# Allegro board backup.brd
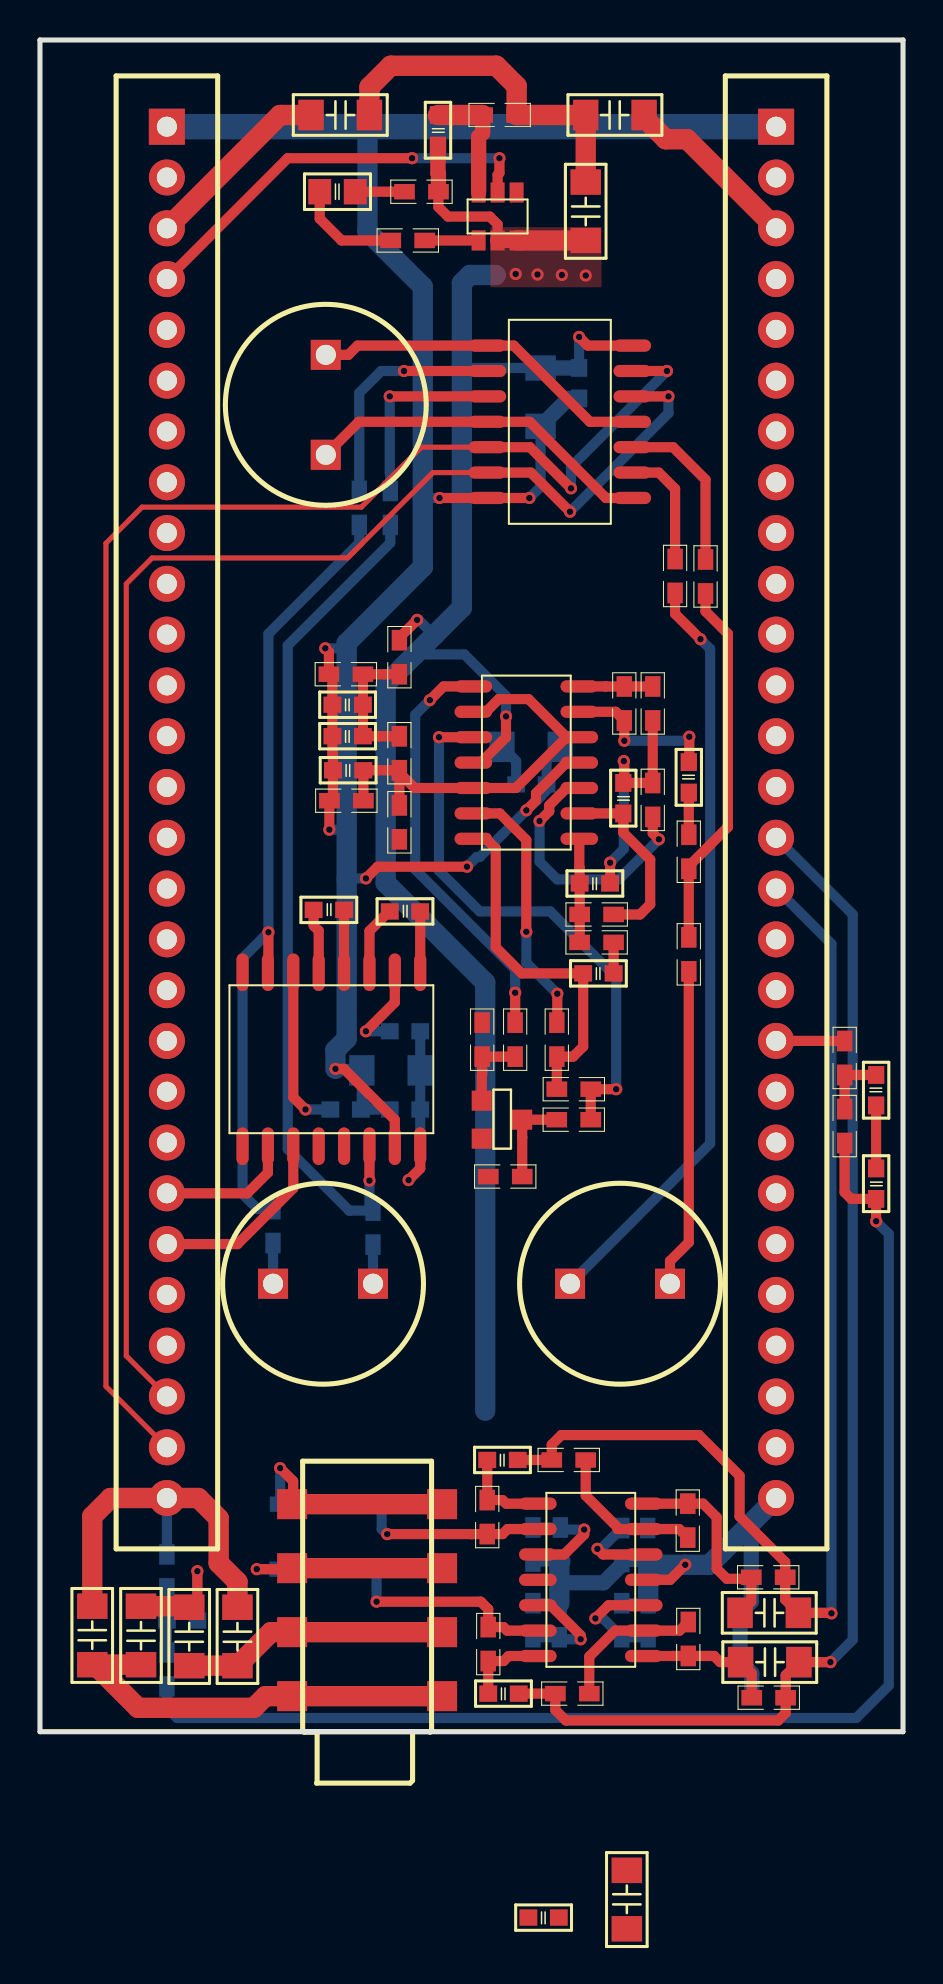
[diagram p0: board, top side]
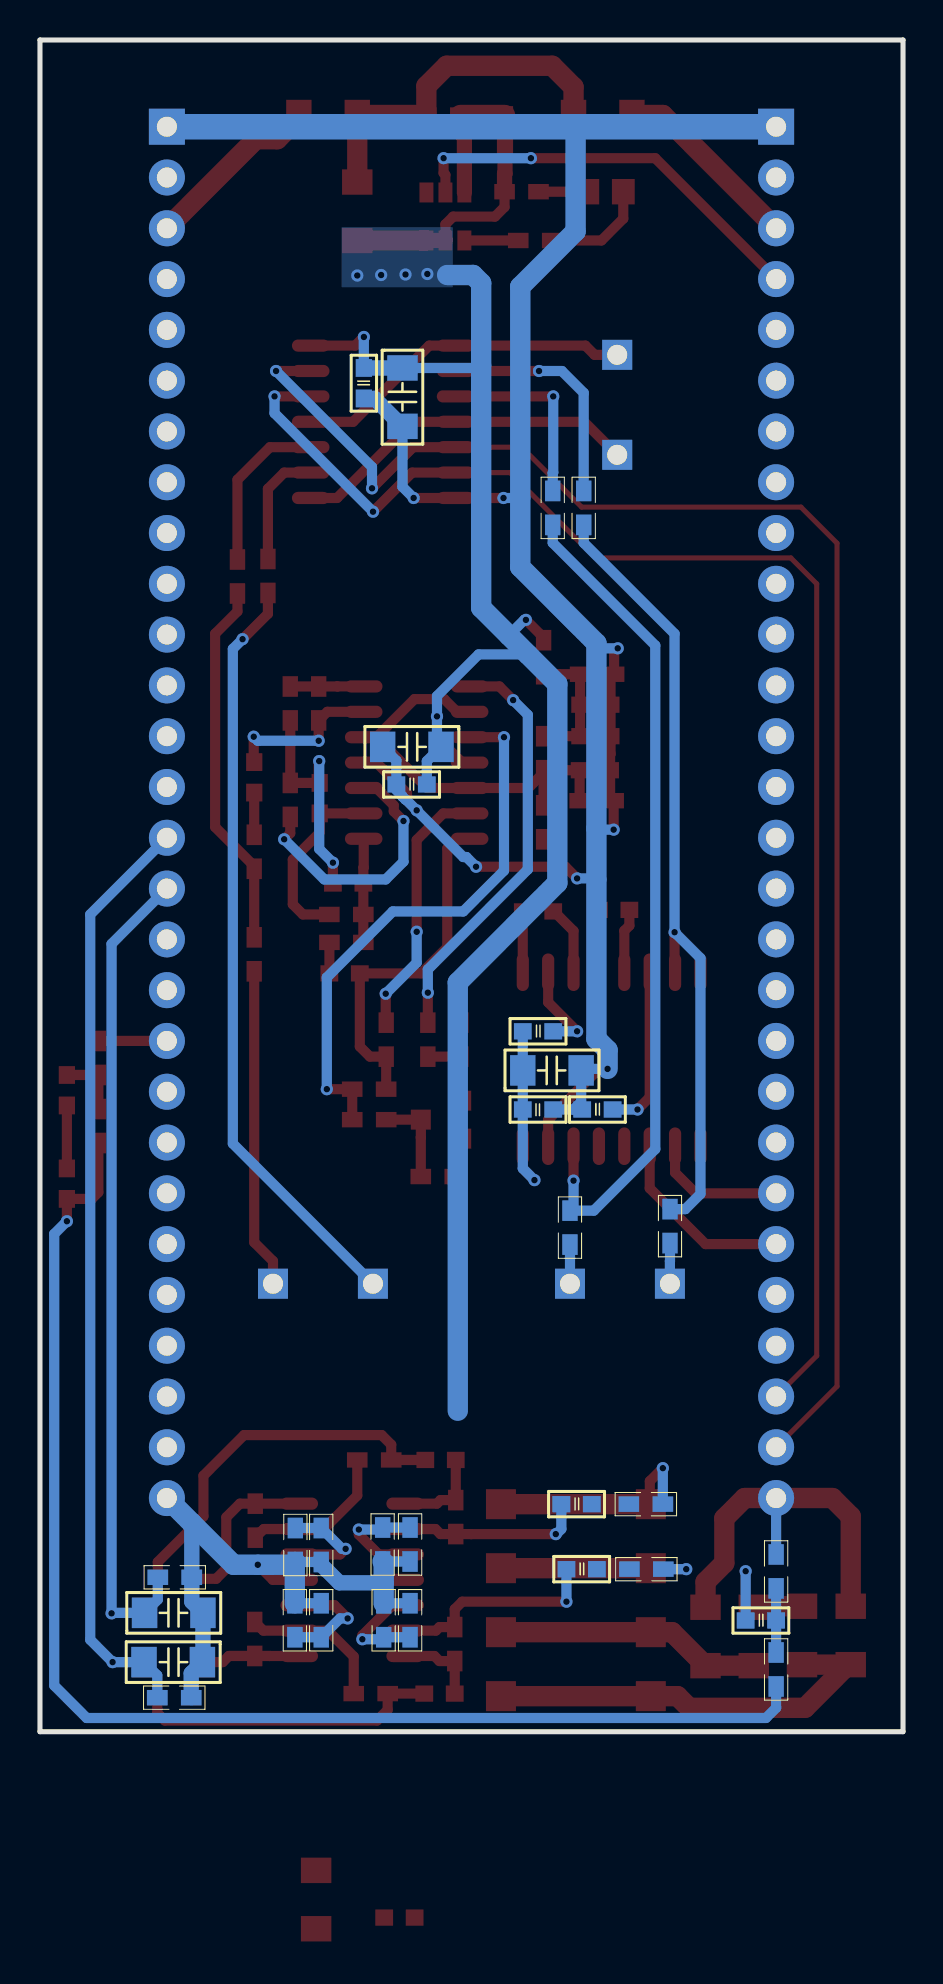
[diagram p1: board, bottom side, seen from below]

Outline 43.18 x 84.6 mm; copper layers: TOP, BOTTOM. Coordinates in mm from the lower left corner of the outline.
Outline path: 0,84.6 0,0 43.18,0 43.18,84.6 0,84.6

## Placement (name value [footprint] x y rotation side)
C1  0.1uF  [C0603]  19.91 80.09 90 top
C2  0.1uF  [C0603]  41.83 32.08 270 top
C3  0.1uF  [C0603]  41.83 27.41 90 top
C4  10uF  [C0603]  7.11 5.56 0 bottom
C5  0.1uF  [C0603]  18.26 41.02 180 top
C6  0.1uF  [C0603]  18.26 31.11 180 bottom
C7  10uF  [C1206]  19.28 33.07 180 bottom
C8  0.1uF  [C0603]  14.45 41.1 180 top
C9  0.1uF  [C0603]  18.26 35.03 0 bottom
C10  0.1uF  [C0603]  15.29 31.11 0 bottom
C11  10uF  [C0603]  23.14 13.59 0 top
C12  10uF  [C0603]  16.33 11.38 0 bottom
C13  47uF  [C1206]  38.2 5.94 180 bottom
C14  10uF  [C0603]  16.08 8.13 0 bottom
C15  47uF  [C1206]  34.8 3.48 0 bottom
C16  10uF  [C0603]  23.19 1.91 0 top
C17  10uF  [C0603]  32.46 47.73 270 top
C18  0.1uF  [C0603]  29.18 46.69 90 top
C19  10uF  [C0603]  27.94 37.92 0 top
C20  0.1uF  [C0603]  27.76 42.42 0 top
C21  0.1uF  [C0603]  26.97 67.44 270 bottom
C22  10uF  [C1206]  25.04 68.45 270 bottom
C23  0.1uF  [C0603]  25.2 -9.3 0 top
C24  10uF  [C1206]  29.36 -6.68 270 top
C25  10uF  [C0603]  15.39 51.36 0 top
C26  10uF  [C0603]  15.39 49.78 0 top
C27  10uF  [C0603]  15.42 48.08 0 top
C28  0.1uF  [C0603]  24.59 47.37 0 bottom
C29  10uF  [C1206]  22.86 49.25 0 bottom
D1  LED  [C0805]  14.88 77.01 180 top
D2  DIODE PIN  [C1206]  38.2 5.94 180 top
D3  DIODE PIN  [C1206]  38.23 3.48 180 top
J1  CONN FLEX 28  [PIN28]  36.83 80.26 180 top
J2  CONN FLEX 28  [PIN28]  6.35 80.26 180 top
MK1  T  [SPEAKER_10MM]  16.66 22.4 90 top
MK2  T  [SPEAKER_10MM]  31.52 22.4 90 top
MK3  T  [SPEAKER_10MM]  14.3 63.86 0 top
Q1  MMBT3904/SOT  [MMBT3904]  23.11 30.61 180 top
R1  0  [C1206]  5.05 3.1 90 top
R2  0  [C1206]  7.47 3.05 90 top
R3  0  [C1206]  2.62 6.53 270 top
R4  0  [C1206]  27.05 80.85 0 top
R5  0  [C1206]  16.74 80.85 180 top
R6  10K  [R0603]  17.55 74.57 0 top
R7  0  [C1206]  9.88 3.05 90 top
R8  10K  [R0603]  18.24 77.01 0 top
R9  10K  [R0603]  40.26 32.84 90 top
R10  10K  [R0603]  40.26 29.44 90 top
R11  10K  [R0603]  22.15 80.85 0 top
R12  10K  [R0603]  6.35 3.96 270 bottom
R13  0  [C1206]  27.3 74.32 90 top
R14  10K  [R0603]  6.35 8.86 270 bottom
R15  0  [R0603]  35.59 7.72 0 top
R16  10K  [R0603]  22.38 11.58 270 top
R17  10K  [R0603]  32.41 11.4 270 top
R18  10K  [R0603]  35.59 7.72 0 bottom
R19  1K  [R0603]  13.72 11.38 180 bottom
R20  10K  [R0603]  27.3 13.59 180 top
R21  10K  [R0603]  22.43 27.76 0 top
R22  1K  [R0603]  13.69 8.13 180 bottom
R23  10K  [R0603]  27.48 1.91 180 top
R24  3.9K  [R0603]  22.12 35.46 270 top
R25  10K  [R0603]  32.44 5.49 270 top
R26  10K  [R0603]  37.31 1.7 180 bottom
R27  10K  [R0603]  22.43 5.23 270 top
R28  10K  [R0603]  23.77 35.46 270 top
R29  6.8K  [R0603]  30.66 50.57 90 top
R30  0  [R0603]  35.61 1.7 0 top
R31  1K  [R0603]  25.86 30.61 0 top
R32  47K  [R0603]  29.24 50.57 90 top
R33  10K  [R0603]  32.46 43.15 90 top
R34  160  [R0603]  30.66 47.45 270 top
R35  2K  [R0603]  27.56 32.13 180 top
R36  75K  [R0603]  25.86 35.46 270 top
R37  1K  [R0603]  24.66 10.21 270 bottom
R38  10K  [R0603]  26.04 10.21 270 bottom
R39  1K  [R0603]  24.66 4.72 90 bottom
R40  10K  [R0603]  25.98 4.72 90 bottom
R41  1K  [R0603]  30.4 10.19 270 bottom
R42  10K  [R0603]  29.11 10.19 270 bottom
R43  1K  [R0603]  30.43 4.72 90 bottom
R44  10K  [R0603]  29.11 4.72 90 bottom
R45  75K  [R0603]  28.7 40.87 180 top
R46  0  [R0603]  17.53 60.35 90 bottom
R47  10K  [R0603]  27 39.47 0 top
R48  0  [R0603]  15.98 60.35 90 bottom
R49  1K  [R0603]  17.98 54.58 270 top
R50  1K  [R0603]  16.15 52.88 180 top
R51  120K  [R0603]  17.98 48.08 90 top
R52  0  [R0603]  17.98 44.63 90 top
R53  0  [R0603]  33.3 56.92 90 top
R54  0  [R0603]  31.78 56.95 90 top
R55  120K  [R0603]  14.48 46.56 0 top
R56  0  [R0603]  16.66 24.36 90 bottom
R57  0  [R0603]  11.66 24.43 90 bottom
R58  0  [R0603]  32.46 39.73 270 top
U1  MIC  [MIC_3-5MM_4PIN]  20.12 1.78 90 top
U2  -  [FDG6342L]  21.95 74.57 90 top
U3  -  [MAX202E]  14.58 33.63 270 top
U4  -  [SGM324YS14]  27.56 7.59 0 top
U5  -  [SGM324YS14]  24.33 48.46 0 top
U6  -  [CD4066]  26.01 65.51 0 top

## Library data of the parts
C1-C29 = CAP NP
D1 = LED
D2 D3 = DIODE PIN
J1 J2 = CONN FLEX 28
MK1-MK3 = MICROPHONE
Q1 = MMBT3904/SOT_1
R1-R58 = R
U1 = MIC
U2 = FDG6342L
U3 = MAX3232EUE
U4 U5 = SGM324YS14
U6 = CD4066

## Footprints (pads in the part's own frame, mm; a bottom-side part is the same pattern mirrored in y, then rotated)
C0603
  rect 0.889x0.813 smd: 1(-0.762,0) 2(0.762,0)
C0805
  rect 1.143x1.27 smd: 1(-0.889,0) 2(0.889,0)
C1206
  rect 1.27x1.524 smd: 1(0.254,0) 2(3.175,0)
CD4066
  oval 1.88x0.61 smd: 1(-3.625,3.81) 2(-3.625,2.54) 3(-3.625,1.27) 4(-3.625,0) 5(-3.625,-1.27) 6(-3.625,-2.54) 7(-3.625,-3.81) 8(3.625,-3.81) 9(3.625,-2.54) 10(3.625,-1.27) 11(3.625,0) 12(3.625,1.27) 13(3.625,2.54) 14(3.625,3.81)
FDG6342L
  rect 1x0.7 smd: 1(0,0) 2(0,-0.95) 3(0,-1.9) 4(2.4,-1.9) 5(2.4,-0.95) 6(2.4,0)
MAX202E
  oval 1.88x0.61 smd: 1(-4.35,4.445) 2(-4.35,3.175) 3(-4.35,1.905) 4(-4.35,0.635) 5(-4.35,-0.635) 6(-4.35,-1.905) 7(-4.35,-3.175) 8(-4.35,-4.445) 9(4.35,-4.445) 10(4.35,-3.175) 11(4.35,-1.905) 12(4.35,-0.635) 13(4.35,0.635) 14(4.35,1.905) 15(4.35,3.175) 16(4.35,4.445)
MIC_3-5MM_4PIN
  rect 1.5x1.5 smd: 1(0,0) 2(3.2,0) 3(6.4,0) 4(9.6,0) 5(9.6,7.5) 6(6.4,7.5) 7(3.2,7.5) 8(0,7.5)
MMBT3904
  rect 1x1 smd: 1(1.01,-0.95) 2(1.01,0.95) 3(-1.01,0)
PIN28
  rect 1.801x1.801 hole 1.001: 1(0,0)
  round 1.801 hole 1.001: 2(0,2.54) 3(0,5.08) 4(0,7.62) 5(0,10.16) 6(0,12.7) 7(0,15.24) 8(0,17.78) 9(0,20.32) 10(0,22.86) 11(0,25.4) 12(0,27.94) 13(0,30.48) 14(0,33.02) 15(0,35.56) 16(0,38.1) 17(0,40.64) 18(0,43.18) 19(0,45.72) 20(0,48.26) 21(0,50.8) 22(0,53.34) 23(0,55.88) 24(0,58.42) 25(0,60.96) 26(0,63.5) 27(0,66.04) 28(0,68.58)
R0603
  rect 1.031x0.77 smd: 1(0,0) 2(1.699,0)
SGM324YS14
  oval 1.88x0.61 smd: 1(-2.65,3.81) 2(-2.65,2.54) 3(-2.65,1.27) 4(-2.65,0) 5(-2.65,-1.27) 6(-2.65,-2.54) 7(-2.65,-3.81) 8(2.65,-3.81) 9(2.65,-2.54) 10(2.65,-1.27) 11(2.65,0) 12(2.65,1.27) 13(2.65,2.54) 14(2.65,3.81)
SPEAKER_10MM
  rect 1.5x1.5 hole 1: 1(0,0) 2(0,5)

## Nets
1/2VCC: C27.2 R51.1 R52.2 R55.2 U5.2(-IN A) U5.5(+IN B) U5.12(+IN D)
DGND: C2.2 C3.2 C6.2 C7.2 C10.2 C13.2 C15.1 C21.2 C22.2 C23.2 C24.2 C25.1 C26.1 C27.1 C28.2 C29.2 D1.2(CATHODE) J1.1 J1.28 J2.1 J2.28 MK2.2 Q1.2(E) R3.1 R6.1 R7.2 R14.1 R18.1 R24.1 R26.2 R37.2 R38.2 R39.2 R40.2 R41.2 R42.2 R43.2 R44.2 R50.2 R54.1 R55.1 U3.15(GND) U4.11(GND) U5.11(GND) U6.7(VSS)
GND1: R37.1 R38.1 U4.3(+IN A)
GND2: R39.1 R40.1 U4.5(+IN B)
GND3: R41.1 R42.1 U4.12(+IN D)
GND4: R43.1 R44.1 U4.10(+IN C)
VBAT: J1.4
VCC: C1.1 C6.1 C7.1 C9.2 C21.1 C22.1 C23.1 C24.1 C28.1 C29.1 R8.2 R13.1 R21.1 R49.1 U2.2(VOUT1) U2.3(VOUT2) U3.16(VCC) U4.4(VCC) U5.4(VCC) U6.14(VDD)
VDD3V3: J1.3 R4.2
VDD5V: J2.3 R5.2
BOOT0: J2.6
MIC_GND: R2.1 R7.1 U1.2 U1.7
MIC_IN: C4.2 R1.2 R2.2
MIC_LEFT: R19.2 U1.4 U1.5
MIC_RIGHT: R22.2 U1.3 U1.6
NRST: J1.10
PA0: C15.2 C16.2 D3.1(K) J1.15 R23.2 R26.1 R30.2
PA1: C11.2 C13.1 D2.1(K) J1.16 R15.2 R18.2 R20.2
PA2: J1.17
PA3: J1.18
PA4: J1.19 R9.2
PA5: J1.20
PA6: J1.21
PA7: J1.22
PA8: J2.23 U3.11(T1IN)
PA9: J2.22 U3.10(T2IN)
PA10: J2.21
PA11: J2.20
PA12: J2.19
PA13: J2.18
PA14: J2.17
PA15: J2.16
PB0: J1.25 R52.1
PB1: J1.26 Q1.3(C) R21.2 R31.1
PB2: J1.27
PB3: J2.11
PB4: J2.10
PB5: J2.9
PB6: J2.8
PB7: J2.7
PB8: J2.5
PB9: J2.4 U2.5(ON/OFF)
PC0: J1.11
PC1: J1.12
PC2: J1.13
PC3: J1.14
PC4: J1.23
PC5: J1.24
PC6: J2.27 U6.5(CON_B) U6.13(CON_A)
PC7: J2.26 U6.6(CON_C) U6.12(CON_D)
PC8: J2.25
PC9: J2.24
PC10: J2.15
PC11: J2.14
PC12: J2.13
PC13: J1.5
PC14: J1.6
PC15: J1.7
PD0: J1.8
PD1: J1.9
PD2: J2.12
RIN1: R33.1 R53.1 R58.1
TOUT1: R46.1 R56.2 U3.14(T1OUT)
TOUT2: R48.1 R57.2 U3.7(T2OUT)
N16399285: C17.2 R33.2
N16402037: C17.1 R32.1 U5.13(-IN D)
N16402041: R29.2 R32.2 U5.14(OUT D)
N16402104: C18.2 C20.2 R29.1 R34.1
N16402149: R34.2 U5.10(+IN C)
N16402349: C18.1 R45.1 U5.9(-IN C)
N16402353: C20.1 R45.2 R47.1 U5.8(OUT C)
N16402571: C19.2 R47.2
N16402585: C19.1 R35.2 R36.2 U5.7(OUT B)
N16402610: R36.1 U5.6(-IN B)
N16402861: R31.2 R35.1 U5.3(+IN A)
N16403394: C25.2 C26.2 R49.2 R50.1 R51.2
N16489611: R28.1 U5.1(OUT A)
N16489615: Q1.1(B) R24.2 R28.2
N16496366: R1.1 R3.2 U1.1 U1.8
N16496686: C2.1 R9.1 R10.2
N16496722: C3.1 R10.1 R12.2
N16497141: C4.1 R12.1 R14.2
N16497486: C12.2 R16.2 U4.2(-IN A)
N16497494: C12.1 R19.1
N16497624: C11.1 R16.1 U4.1(OUT A)
N16497986: C14.1 R22.1
N16497996: C14.2 R27.1 U4.6(-IN B)
N16498091: C16.1 R27.2 U4.7(OUT B)
N16498977: R17.2 R20.1 U4.13(-IN D)
N16498986: D2.2(A) R15.1 R17.1 U4.14(OUT D)
N16499222: R23.1 R25.1 U4.9(-IN C)
N16499259: D3.2(A) R25.2 R30.1 U4.8(OUT C)
N16503662: MK3.2 U6.1(A) U6.11(D0)
N16503677: MK3.1 U6.4(B0) U6.8(C)
N16503744: R48.2 U6.2(A0)
N16503759: R46.2 U6.3(B)
N16503929: R53.2 U6.10(D)
N16503933: R54.2 U6.9(C0)
N16508094: C5.1 U3.1(C1+)
N16508118: C5.2 U3.3(C1-)
N16508122: C8.1 U3.4(C2+)
N16508134: C8.2 U3.5(C2-)
N16508194: C9.1 U3.2(V+)
N16508198: C10.1 U3.6(V-)
N16508477: R4.1 R5.1 R11.2 R13.2 U2.4(VIN)
N16508598: C1.2 R11.1 U2.6(R1)
N16509172: R6.2 U2.1(R2)
N16519451: MK1.1 R56.1
N16519490: MK1.2 R57.1
N16520069: MK2.1 R58.2
N165143311: D1.1(ANODE) R8.1

Pads without a net: J1 2; J2 2; U3 8 9 12 13

## Via types
v1: diameter 0.61, hole 0.33, TOP to BOTTOM, 54 vias

## Routing (per net, layer and track width the routed paths; a pad name or vN(x,y) marks a point on that pad's centre or on a via; arc(x,y) is an arc through that point)
1/2VCC: length 21.2
  TOP w0.508: 26.35,49.73 24.44,51.64 22.95,51.64 22.32,51 U5.2 ; 26.35,49.73 U5.12 ; 26.35,49.73 23.81,47.19 U5.5 18.74,47.19 17.98,47.95 ; 17.98,47.95 R52.2 ; 17.98,47.95 R51.1 C27.2 16.18,46.56 R55.2
DGND: length 230.5
  TOP w0.508: v1(21.36,43.26) 16.89,43.26 v1(16.31,42.67) ; v1(24.33,46.08) 24.82,46.56 24.82,46.93 26.35,48.46 U5.11 ; v1(32.28,8.35) 31.53,7.59 U4.11 ; U3.15 17.75,30.6 15.21,33.15 v1(14.78,33.15) ; R6.1 15.09,74.57 14,75.67 D1.2 ; C2.2 C3.2 ; v1(19.99,61.7) U6.7 v1(24.49,61.7) ; v1(14.27,54.18) 14.46,54 R50.2 14.63,52.71 C25.1 C26.1 14.63,48.9 14.66,48.87 C27.1 14.66,46.74 R55.1 v1(14.48,45.11) ; R54.1 31.78,55.91 v1(33.05,54.64)
  TOP w1.016: R3.1 2.62,10.77 3.53,11.68 J2.28 7.92,11.68 8.94,10.67 8.94,8.43 9.88,7.49 R7.2
  BOTTOM w0.508: 15.34,45.16 15.29,45.11 v1(14.48,45.11) ; v1(14.27,54.18) 15.09,54.18 15.34,54.43 ; v1(24.49,61.7) 25.04,62.26 C22.2 ; v1(16.31,42.67) 15.39,42.67 15.34,42.62 ; 16.48,31.11 C6.2 ; 16.48,31.11 16.1,31.5 C7.2 16.03,33.15 v1(14.78,33.15) ; 16.48,31.11 C10.2 ; J2.28 R14.1 ; C29.2 25.35,48.56 C28.2 25.35,47.09 25.04,46.79 25.04,46.76 24.9,46.61 24.87,46.61 v1(24.33,46.08) 22,43.74 21.85,43.74 v1(21.36,43.26) ; R41.2 R42.2 ; R37.2 R38.2 ; v1(33.05,54.64) 33.53,54.15 33.53,29.41 MK2.2 ; v1(19.99,61.7) 19.15,61.7 ; R39.2 R40.2 ; R44.2 R43.2
  BOTTOM w0.762: C21.2 26.44,66.67 C22.2 ; R26.2 35.61,2.92 C15.1 35.03,3.51 C13.2 35.59,6.5 R18.1 35.59,10.44 ; R42.2 29.11,8.36 28.2,7.45 25.98,7.45
  BOTTOM w1.016: R40.2 25.98,8.46 R38.2 ; 30.43,8.46 30.54,8.35 v1(32.28,8.35) 33.49,8.35 J1.28 ; 30.43,8.46 R43.2 ; 30.43,8.46 R41.2 ; 16.38,80.26 16.38,75.03 19.15,72.26 19.15,58.24 15.34,54.43 15.34,34.65 14.78,34.09 v1(14.78,33.15)
  BOTTOM w1.27: J2.1 J1.1
GND1: length 5.6
  TOP w0.508: U4.3 26.23,8.86 27.23,9.86 v1(27.23,10.11)
  BOTTOM w0.508: v1(27.23,10.11) 26.14,10.11 R38.1 R37.1
GND2: length 5.4
  TOP w0.508: U4.5 25.54,6.32 27.05,4.82 v1(27.05,4.62)
  BOTTOM w0.508: v1(27.05,4.62) 26.09,4.62 R40.1 R39.1
GND3: length 5.4
  TOP w0.508: U4.12 28.17,8.86 v1(27.89,9.14)
  BOTTOM w0.508: v1(27.89,9.14) 28.07,9.14 R42.1 R41.1
GND4: length 5.7
  TOP w0.508: v1(27.79,5.66) 28.45,6.32 U4.10
  BOTTOM w0.508: v1(27.79,5.66) 28.17,5.66 R44.1 R43.1
VCC: length 109.4
  TOP w0.508: U6.14 27.41,69.32 v1(26.97,69.75) ; U3.16 19.02,28.17 v1(18.44,27.58) ; v1(23.32,50.77) 23.32,49.73 22.06,48.46 U5.4 ; R49.1 17.98,54.72 v1(18.87,55.6) ; U2.2 22.9,75.38 22.51,75.77 20.42,75.77 19.94,76.25 R8.2
  TOP w0.762: R8.2 19.94,77.91 19.91,77.93 C1.1 ; U2.2 U2.3
  TOP w1.016: U2.3 R13.1
  BOTTOM w0.508: C9.2 C7.1 C6.1 19.02,28.17 v1(18.44,27.58) ; 21.11,68.33 21.23,68.2 C22.1 ; 19.72,54.83 18.95,55.6 v1(18.87,55.6) ; v1(26.97,69.75) C21.1 ; 18.77,53.87 21.23,53.87 23.32,51.79 v1(23.32,50.77) 23.32,49.45 C29.1 23.83,48.54 C28.1
  BOTTOM w0.762: C21.1 C22.1
  BOTTOM w1.016: 22.81,72.85 21.51,72.85 21.11,72.44 21.11,56.21 17.3,52.4 17.3,42.44 22.28,37.47 22.28,16.05
  vias: v1(23.8,72.9) v1(24.89,72.87) v1(26.11,72.85) v1(27.3,72.82)
VDD3V3: length 9
  TOP w1.016: J1.3 32.38,79.64 31.31,79.64 30.23,80.72 R4.2
VDD5V: length 9.6
  TOP w1.016: R5.2 12.01,80.85 J2.3
MIC_GND: length 13.5
  TOP w1.016: R7.1 11.56,4.98 U1.7 U1.2 20.17,4.98 ; R7.1 10.01,3.3 ; R7.1 R2.1
MIC_IN: length 6.9
  TOP w0.508: R2.2 7.87,6.63 v1(7.87,8.03)
  TOP w1.016: R1.2 7.42,6.27 R2.2
  BOTTOM w0.508: C4.2 v1(7.87,8.03)
MIC_LEFT: length 11.4
  TOP w0.508: 12.67,11.38 12.67,12.53 v1(12.02,13.18)
  TOP w1.016: 20.17,11.38 U1.4 12.67,11.38
  BOTTOM w0.508: R19.2 v1(12.02,13.18)
MIC_RIGHT: length 10.5
  TOP w0.508: v1(10.85,8.13) 12.62,8.13 12.67,8.18
  TOP w1.016: 20.17,8.18 U1.3 12.67,8.18
  BOTTOM w0.508: R22.2 v1(10.85,8.13)
PA0: length 65.8
  TOP w0.508: C16.2 25.78,1.91 25.78,1.09 26.31,0.56 36.93,0.56 37.31,0.94 R30.2 37.31,2.82 D3.1 v1(39.55,3.48)
  BOTTOM w0.508: J1.15 40.67,40.87 40.67,4.6 v1(39.55,3.48) D3.1 37.31,2.82 R26.1
PA1: length 63.8
  TOP w0.508: C11.2 R20.2 25.61,14.35 26.08,14.83 32.97,14.83 35,12.8 35,10.77 37.28,8.49 R15.2 37.28,6.61 D2.1 39.57,5.94 v1(39.6,5.92)
  BOTTOM w0.508: J1.16 39.6,39.4 v1(39.6,5.92) 39.57,5.94 D2.1 37.28,6.61 R15.2
PA4: length 3.4
  TOP w0.508: J1.19 39.49,34.54 39.49,34.54 R9.2
PA8: length 9.6
  TOP w0.508: U3.11 12.67,27.18 9.88,24.38 J2.23
PA9: length 6.8
  TOP w0.508: J2.22 10.37,26.92 11.4,27.96 U3.10
PB1: length 4.6
  TOP w0.508: R21.2 24.13,29.72 24.12,29.73 Q1.3 R31.1
PB9: length 20.9
  TOP w0.508: U2.5 22.9,77.86 22.99,77.95 v1(22.99,78.69) ; J2.4 12.4,78.69 v1(18.62,78.69)
  BOTTOM w0.508: v1(18.62,78.69) v1(22.99,78.69)
PC6: length 82.2
  TOP w0.254: J2.27 3.3,17.27 3.3,59.44 5.11,61.24 16.08,61.24 19.08,64.24 U6.5
  TOP w0.508: v1(31.37,68.05) U6.13 ; U6.5 24.51,64.24 v1(26.57,62.18)
  BOTTOM w0.508: v1(31.37,68.05) 26.57,63.25 v1(26.57,62.18)
PC7: length 76.4
  TOP w0.254: U6.6 19.66,62.97 15.39,58.7 5.61,58.7 4.32,57.4 4.32,18.8 J2.26
  TOP w0.508: v1(26.52,61.01) 24.56,62.97 U6.6 ; v1(31.45,66.78) U6.12
  BOTTOM w0.508: v1(26.52,61.01) 31.45,65.94 v1(31.45,66.78)
RIN1: length 18.5
  TOP w0.508: R58.1 R33.1 32.46,43.29 34.42,45.24 34.42,54.91 33.3,56.02 R53.1
TOUT1: length 42.2
  TOP w0.508: U3.14 v1(16.48,27.56)
  BOTTOM w0.508: v1(16.48,27.56) 16.48,26.24 R56.2 15.47,26.06 12.4,29.13 12.4,54.32 17.53,59.45 R46.1
TOUT2: length 39.7
  TOP w0.508: U3.7 11.43,38.01 v1(11.43,39.98)
  BOTTOM w0.508: R48.1 15.98,59.45 11.43,54.91 v1(11.43,39.98) 10.13,38.68 10.13,26.89 10.89,26.13 R57.2
N16399285: length 2.1
  TOP w0.508: C17.2 R33.2
N16402037: length 8.1
  TOP w0.508: v1(32.49,49.76) 32.49,48.51 C17.1 ; U5.13 28.8,51 R32.1 v1(29.24,49.56)
  BOTTOM w0.508: v1(29.24,49.56) 32.28,49.56 v1(32.49,49.76)
N16402041: length 3.7
  TOP w0.508: U5.14 28.3,52.27 28.31,52.27 R32.2 R29.2
N16402104: length 12.1
  TOP w0.508: R29.1 R34.1 C18.2 29.24,47.5 29.24,48.51 v1(29.21,48.54) ; C20.2 v1(28.52,43.46)
  BOTTOM w0.508: v1(28.52,43.46) 29.21,44.15 v1(29.21,48.54)
N16402149: length 13.3
  TOP w0.508: v1(24.99,45.54) 25.48,46.03 25.48,46.32 26.35,47.19 U5.10 ; R34.2 30.66,44.93 v1(30.96,44.63)
  BOTTOM w0.508: v1(30.96,44.63) 28.96,42.62 25.88,42.62 24.99,43.51 v1(24.99,45.54)
N16402349: length 9.3
  TOP w0.508: R45.1 30.02,40.87 30.53,41.38 30.53,43.61 29.18,44.96 C18.1 U5.9
N16402353: length 5.2
  TOP w0.508: U5.8 26.98,43.22 27,43.21 C20.1 27,42.42 R45.2 27,39.47 R47.1
N16402571: length 1.6
  TOP w0.508: R47.2 28.7,37.92 C19.2
N16402585: length 18
  TOP w0.508: R35.2 25.86,33.76 R36.2 26.67,33.76 27.18,34.26 C19.1 24.1,37.92 22.8,39.22 22.8,44.17 22.32,44.65 U5.7
N16402610: length 13
  TOP w0.508: v1(25.88,36.91) 25.88,35.48 R36.1 ; U5.6 23,45.92 24.33,44.59 v1(24.33,40.01)
  BOTTOM w0.508: v1(25.88,36.91) 24.33,38.46 v1(24.33,40.01)
N16402861: length 27.9
  TOP w0.508: U5.3 v1(19.96,49.73) ; v1(28.83,32.13) R35.1 27.56,32.13 R31.2
  BOTTOM w0.508: v1(28.83,32.13) 28.83,37.72 25.53,41.02 22,41.02 19.96,43.06 v1(19.96,49.73)
N16403394: length 6.8
  TOP w0.508: R51.2 16.98,49.78 16.98,49.78 C26.2 C25.2 R50.1 17.21,52.88 17.22,52.89 R49.2
N16489611: length 21
  TOP w0.508: v1(23.77,36.96) R28.1 ; U5.1 20.19,52.27 v1(19.51,51.59)
  BOTTOM w0.508: v1(23.77,36.96) 23.77,38.12 18.77,43.12 18.77,50.85 v1(19.51,51.59)
N16489615: length 3.9
  TOP w0.508: Q1.1 22.1,32.84 22.12,32.86 R24.2 R28.2
N16496366: length 21
  TOP w1.016: R3.2 2.74,3.35 ; 2.74,3.35 4.9,1.19 10.7,1.19 11.28,1.78 U1.8 U1.1 20.17,1.78 ; 2.74,3.35 R1.1
N16496686: length 3.3
  TOP w0.508: R10.2 R9.1 C2.1
N16496722: length 66.8
  TOP w0.508: R10.1 40.26,26.97 40.59,26.64 C3.1 v1(41.83,25.53)
  BOTTOM w0.508: v1(41.83,25.53) 42.47,24.89 42.47,2.31 40.84,0.69 6.86,0.69 6.35,1.19 R12.2
N16497141: length 3.2
  BOTTOM w0.508: R12.1 C4.1 R14.2
N16497486: length 9.3
  TOP w0.508: U4.2 23.39,10.13 23.14,9.88 R16.2 21.61,9.88 21.61,9.88 v1(17.37,9.88)
  BOTTOM w0.508: C12.2 17.09,10.13 17.35,9.88 v1(17.37,9.88)
N16497624: length 4.6
  TOP w0.508: C11.1 R16.1 23.14,11.58 23.32,11.4 U4.1
N16497996: length 10.8
  TOP w0.508: U4.6 23.37,5.05 23.19,5.23 R27.1 22.43,6.13 22.05,6.5 v1(16.84,6.5)
  BOTTOM w0.508: C14.2 v1(16.84,6.5)
N16498091: length 4.2
  TOP w0.508: C16.1 R27.2 23.19,3.53 23.45,3.78 U4.7
N16498977: length 7.8
  TOP w0.508: 28.98,10.13 28.89,10.13 ; 28.98,10.13 U4.13 31.98,10.13 R17.2 ; 28.98,10.13 27.3,11.81 R20.1
N16498986: length 10.5
  TOP w0.508: D2.2 35.59,6.5 R15.1 35.51,7.65 34.37,7.65 33.86,8.15 33.86,10.72 33.18,11.4 R17.1 U4.14
N16499222: length 7.5
  TOP w0.508: R25.1 32,5.05 U4.9 28.78,5.05 27.48,3.76 R23.1
N16499259: length 7
  TOP w0.508: R30.1 35.61,2.92 D3.2 34.04,3.48 33.73,3.79 R25.2 31.67,3.79 31.67,3.78 U4.8
N16503662: length 17.1
  TOP w0.508: U6.11 27.52,65.51 23.71,69.32 U6.1 15.89,69.32 15.43,68.86 MK3.2
N16503677: length 17.6
  TOP w0.508: U6.8 28.31,61.7 24.5,65.51 U6.4 15.95,65.51 MK3.1
N16503744: length 11.8
  TOP w0.508: U6.2 v1(18.21,68.05)
  BOTTOM w0.508: v1(18.21,68.05) 17.07,68.05 15.98,66.95 R48.2
N16503759: length 9.6
  TOP w0.508: U6.3 v1(17.5,66.78)
  BOTTOM w0.508: R46.2 17.53,62.95 17.5,62.97 v1(17.5,66.78)
N16503929: length 8.3
  TOP w0.508: U6.10 31.67,64.24 33.3,62.61 R53.2
N16503933: length 6
  TOP w0.508: R54.2 31.78,62.15 30.96,62.97 U6.9
N16508094: length 3
  TOP w0.508: U3.1 C5.1
N16508118: length 3.5
  TOP w0.508: C5.2 17.46,41.02 16.48,40.04 U3.3
N16508122: length 3.1
  TOP w0.508: U3.4 C8.1
N16508134: length 3.2
  TOP w0.508: U3.5 13.94,40.06 13.69,40.31 C8.2
N16508194: length 4.7
  TOP w0.508: v1(16.31,35.03) 17.75,36.47 U3.2
  BOTTOM w0.508: v1(16.31,35.03) C9.1
N16508198: length 8.4
  TOP w0.508: U3.6 12.67,31.72 v1(13.28,31.11)
  BOTTOM w0.508: v1(13.28,31.11) C10.1
N16508477: length 17.9
  TOP w1.016: R5.1 16.48,82.25 17.55,83.31 22.83,83.31 23.85,82.3 R11.2 R4.1 R13.2
N16508598: length 6.2
  TOP w0.762: R11.1 22.15,79.96 21.95,79.75 U2.6
  TOP w1.016: C1.2 R11.1
N16509172: length 2.7
  TOP w0.508: U2.1 R6.2
N16519451: length 2
  BOTTOM w0.508: R56.1 MK1.1
N16519490: length 2
  BOTTOM w0.508: R57.1 11.66,23.54 11.66,23.53 MK1.2
N16520069: length 16
  TOP w0.508: R58.2 32.46,24.47 31.52,23.53 MK2.1
N165143311: length 2.5
  TOP w0.508: R8.1 D1.1

## Copper pours and planes (outline as drawn; the poured copper is in the pictures)
VCC on TOP: 28.09,75.23 28.09,72.24 22.53,72.24 22.53,75.23
VCC on BOTTOM: 28.09,72.24 28.09,75.23 22.53,75.23 22.53,72.24
